# Altium PCB dental-unit-AS5600 v1_0.PcbDoc
Units mm, origin at the board's own origin, x right, y up, seen from the top; angles counter-clockwise.
Board outline 34 x 38.63 mm, 2 copper layers (Top Layer, Bottom Layer), stack 0.571 mm thick; 8 components, 7 nets, 34 pads, 57 vias.
Unrouted connection lines stored in the file: 1.
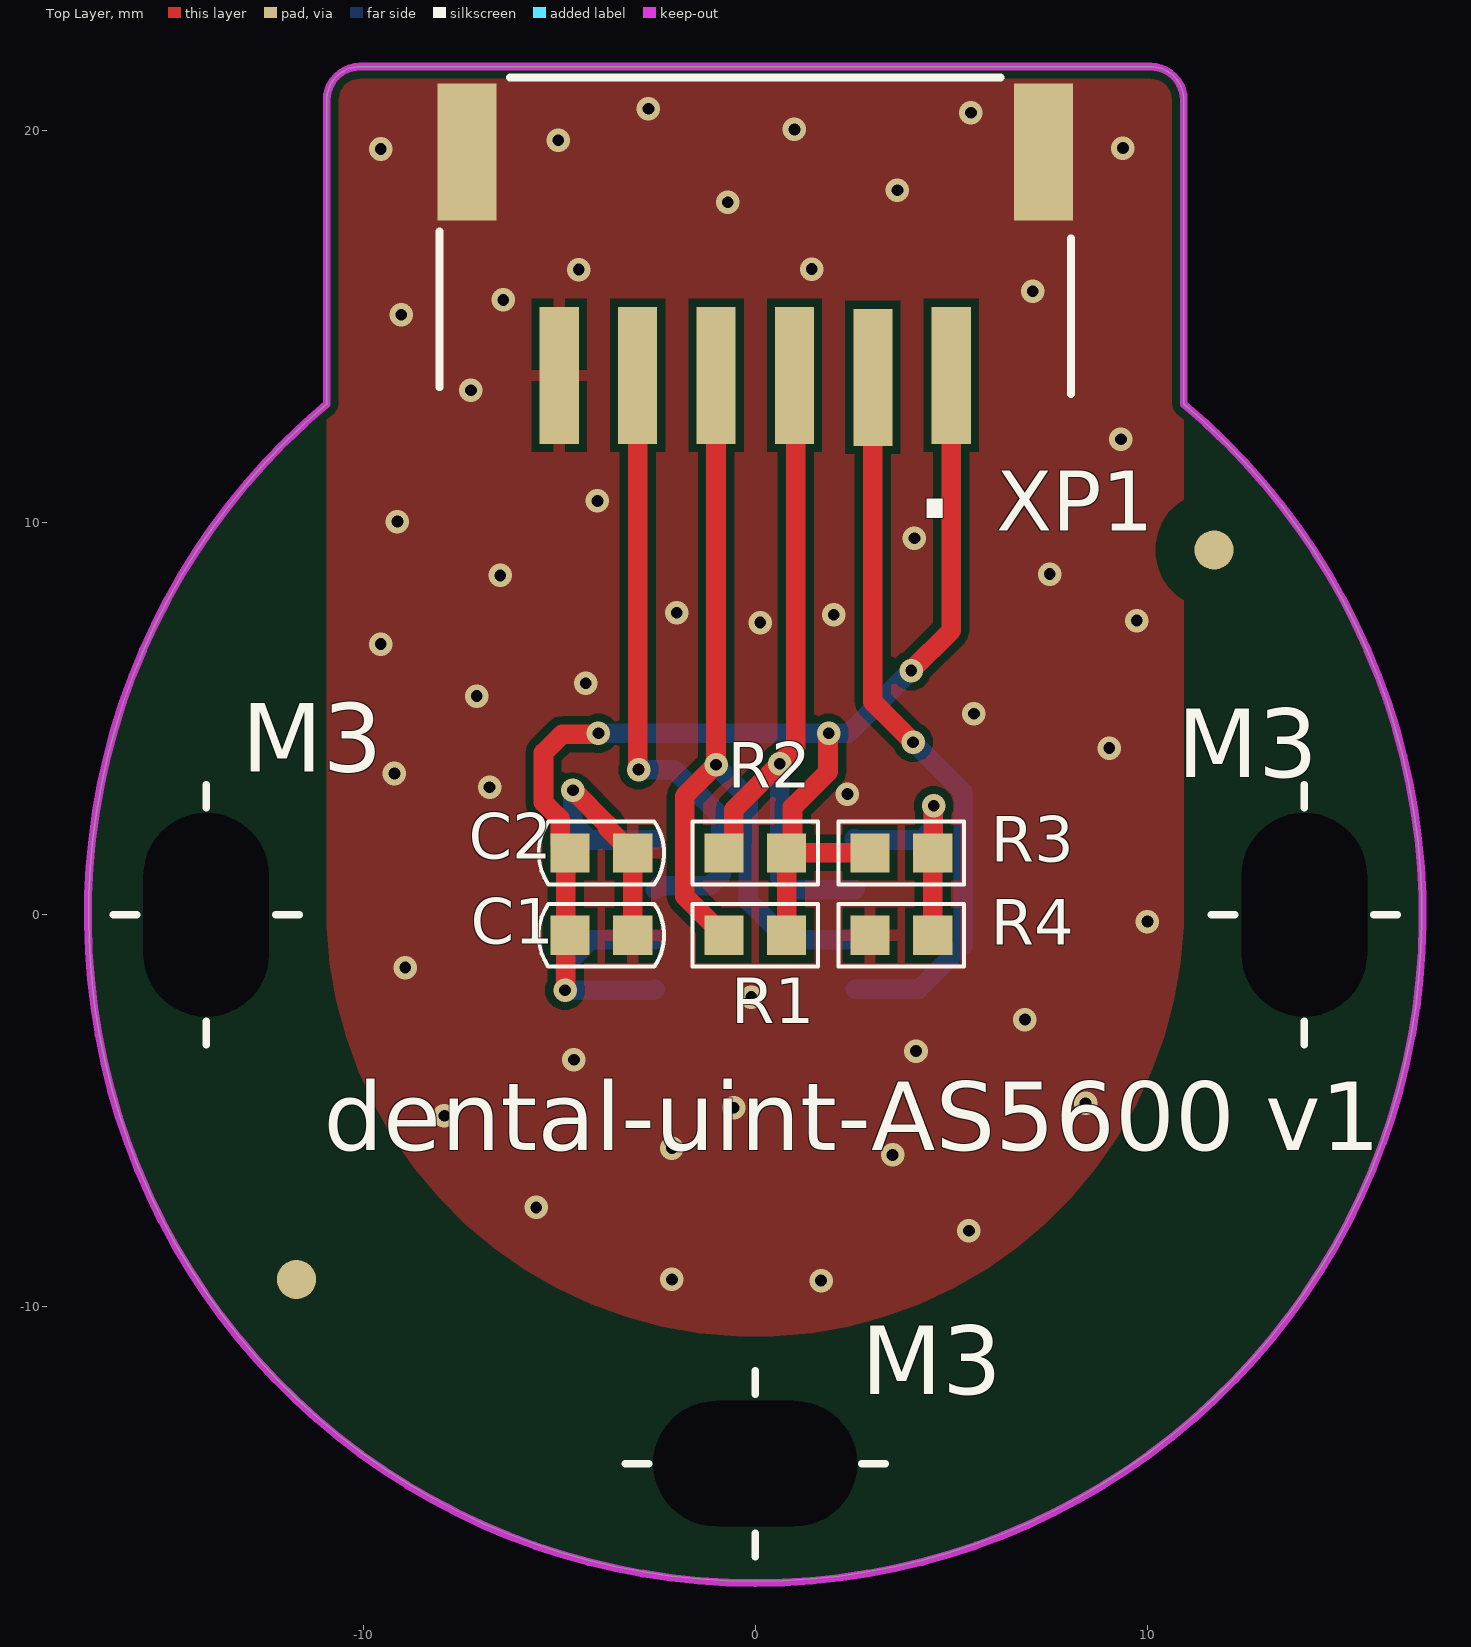
[diagram p0: Top Layer view]
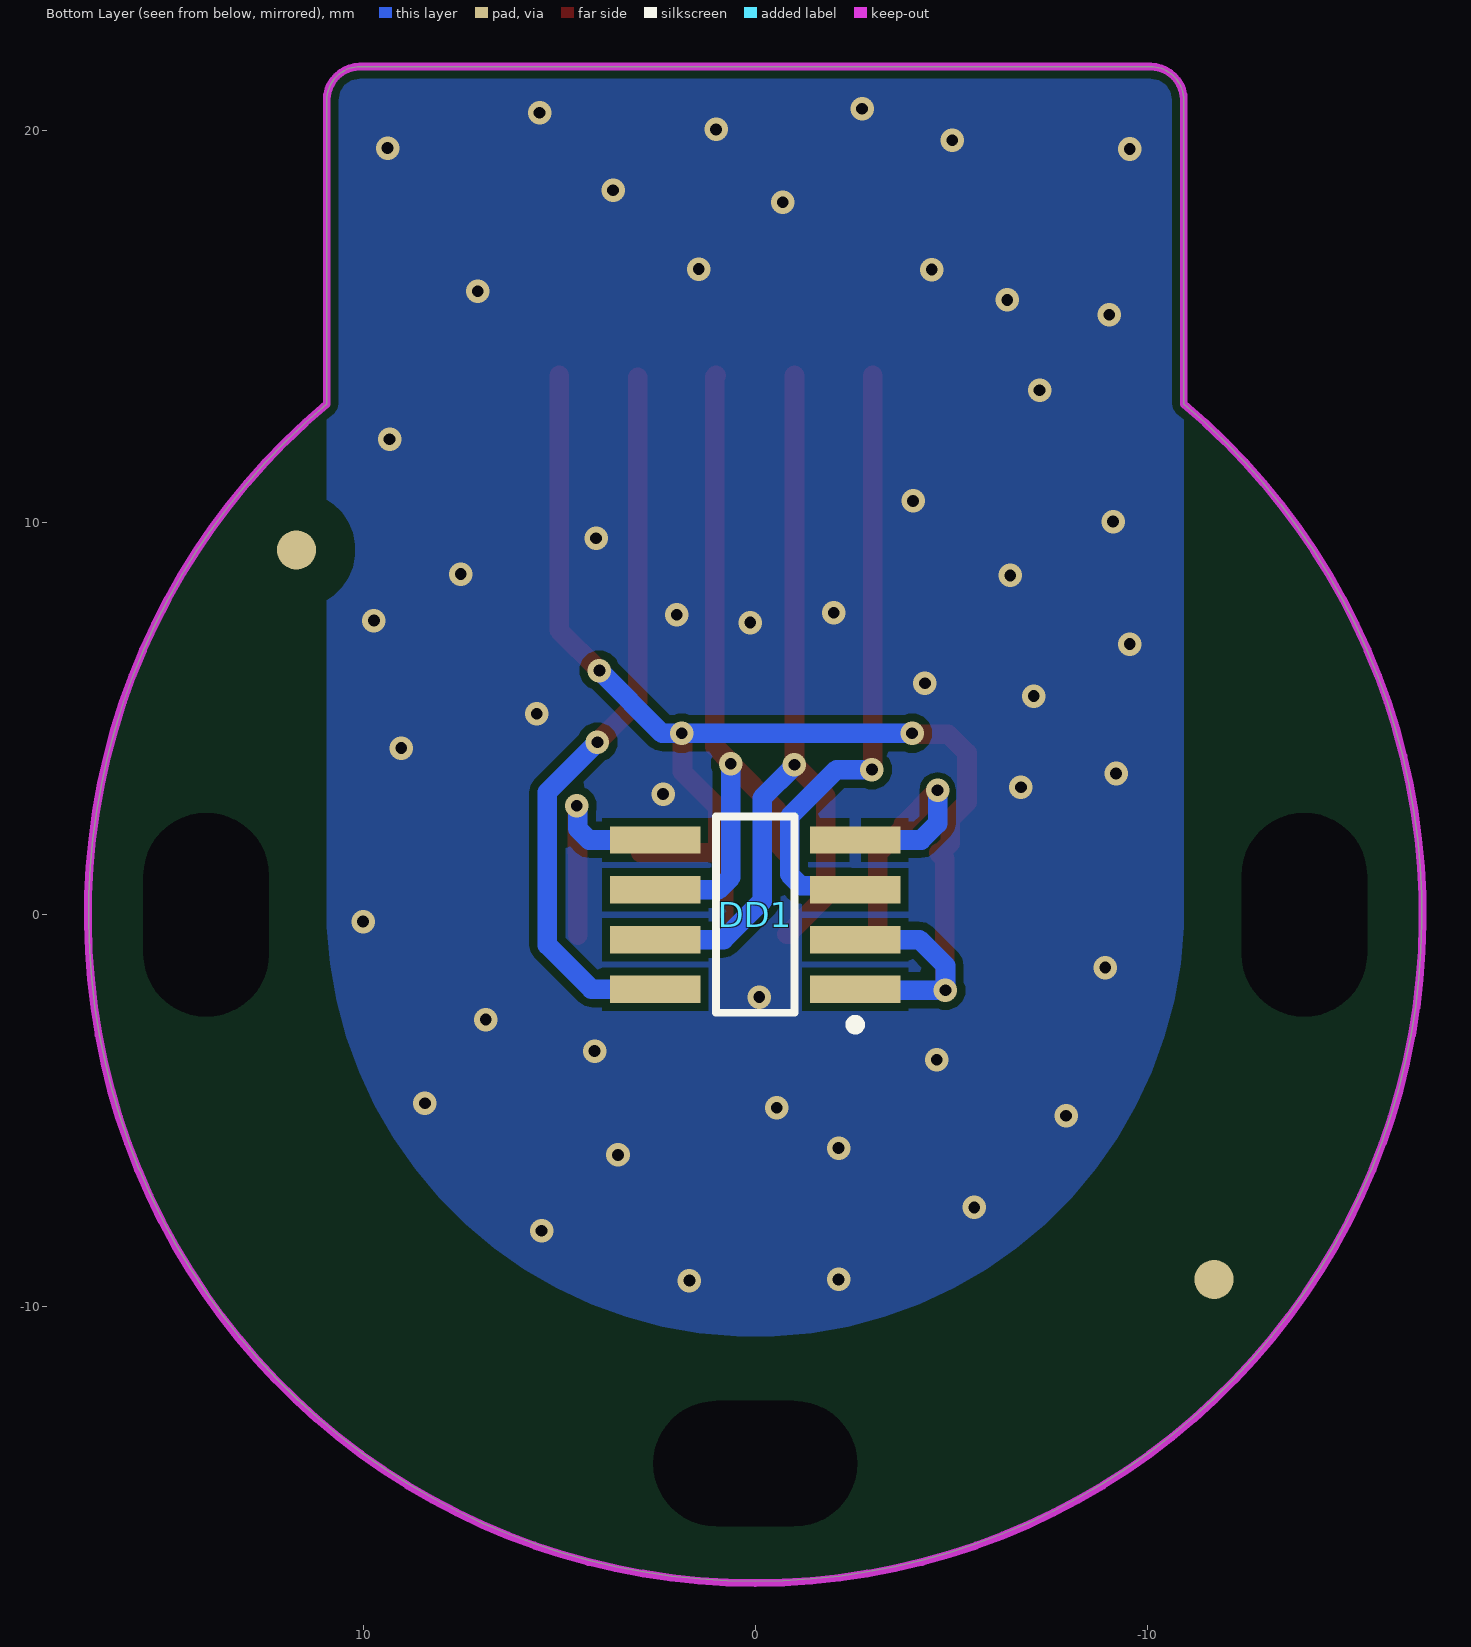
[diagram p1: Bottom Layer view, seen from below]
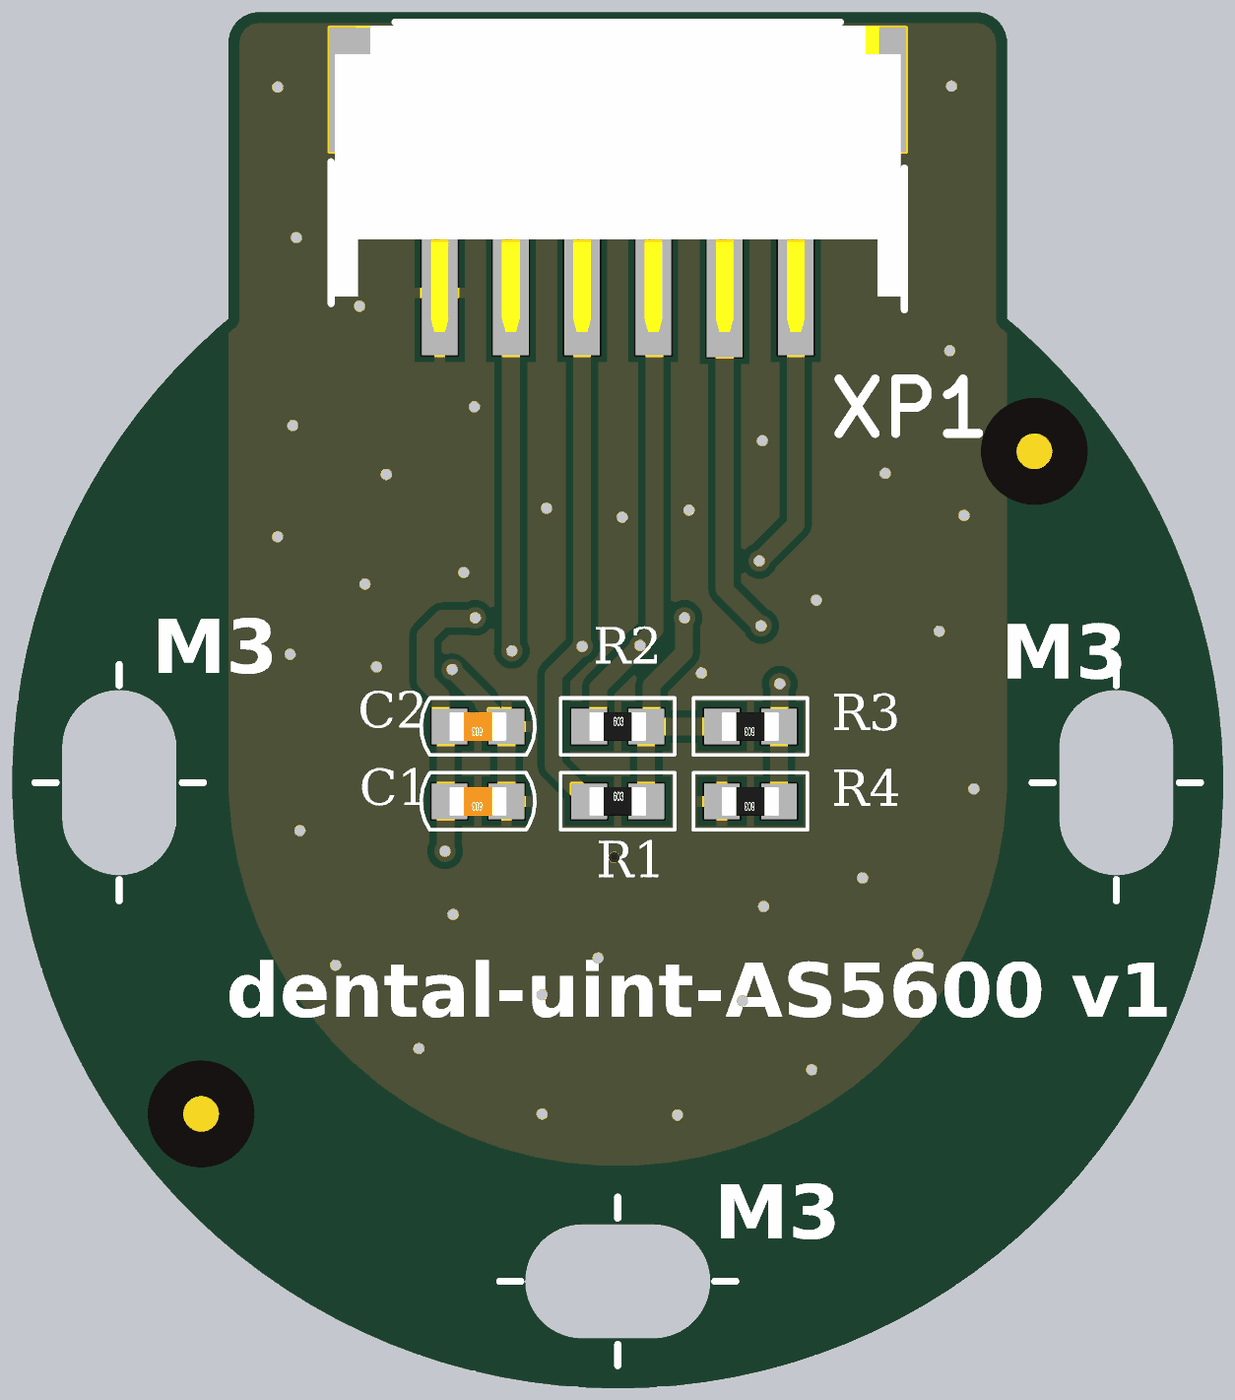
[diagram p2: 3D render of the assembled board from above, using the file's embedded part models]

## Layer stack, top to bottom
Top Solder: solder mask 0.0102, Solder Resist, Dk 3.5
Top Layer: signal copper 0.0356
Dielectric1: core 0.5, FR-4, Dk 4.8
Bottom Layer: signal copper 0.0356
Bottom Solder: solder mask 0.0102, Solder Resist, Dk 3.5

## Board outline
-10.927,13.023 ccw(c0,0) 10.927,13.023 10.927,20.773 ccw(c10.075,20.773) 10.075,21.625 -10.075,21.625 ccw(c-10.075,20.773) -10.927,20.773

## Design rules (kind name [scope] priority, off if disabled: settings)
Clearance "Stitching No Net" [IsStitchingVia and InNet('No Net') vs (IsVia and (Not IsStitchingVia)) Or IsPad] p1: gap=0.127 ignorepadtopadclearanceinfootprint=FALSE except(0: Arc-Hole Track-Hole SMDPad-Hole THPad-Hole Via-Hole Fill-Hole Poly-Hole Region-Hole Text-Hole)
Clearance Clearance_2 [(InPadClass('New Class 2')) vs (InPadClass('New Class 3'))] p2: gap=0.15 ignorepadtopadclearanceinfootprint=FALSE except(0: Arc-Hole Track-Hole SMDPad-Hole THPad-Hole Via-Hole Fill-Hole Poly-Hole Region-Hole Text-Hole)
Clearance Clearance_1 [InPadClass('Reper')] p3: gap=1 ignorepadtopadclearanceinfootprint=FALSE except(0: Arc-Hole Track-Hole SMDPad-Hole THPad-Hole Via-Hole Fill-Hole Poly-Hole Region-Hole Text-Hole)
Clearance [All] p4: gap=0.2 ignorepadtopadclearanceinfootprint=FALSE except(0: Arc-Hole Track-Hole SMDPad-Hole THPad-Hole Via-Hole Fill-Hole Poly-Hole Region-Hole Text-Hole)
HoleSize [(InPadClass('Mounting Holes'))] p1: absolutevalues=TRUE maxlimit=6 minlimit=0.025 maxpercent=80.000 minpercent=20.000
HoleToHoleClearance [All] p1: gap=0.1 allowstackedmicrovias=TRUE
Length [InNetClass('SD_net_class')] p1: maxlimit=27 minlimit=26
MatchedLengths [InNetClass('SD_net_class')] p1: tolerance=1 checknetsindiffpair=FALSE checkdiffpairvsdiffpair=TRUE checkxsignals=TRUE checkothers=TRUE
MinimumSolderMaskSliver [All] p1 off: minsoldermaskwidth=0.1
PlaneClearance [All] p1: clearance=0.2
PlaneConnect [All] p1: planeconnectstyle=Direct reliefexpansion=0.2 reliefentries=4 reliefconductorwidth=0.2 reliefairgap=0.2
PolygonConnect Polygon_24v [InNamedPolygon('24V_L01_P000')] p1: connectstyle=Direct reliefconductorwidth=0.2 reliefentries=4 polygonreliefangle="90 Angle" airgapwidth=0.3
PolygonConnect PolygonConnectCoponent [(InPadClass('New Class'))] p2: connectstyle=Relief reliefconductorwidth=0.3 reliefentries=4 polygonreliefangle="90 Angle" airgapwidth=0.2
PolygonConnect PolygonConnectALL [All] p3: connectstyle=Direct reliefconductorwidth=0.3 reliefentries=2 polygonreliefangle="45 Angle" airgapwidth=0.7
RoutingVias [All] p1: holewidth=0.711 width=1.27 viastyle="Through Hole" minholewidth=0.711 minwidth=1.27 maxholewidth=0.711 maxwidth=1.27
SilkToSilkClearance [All] p1 off: silktosilkclearance=0.254
SilkToSolderMaskClearance [IsPad] p1 off: minsilkscreentomaskgap=0.254 clearancetoexposedcopper=TRUE
SolderMaskExpansion [All] p1: expansion=0.05 istentingtop=FALSE
ViasUnderSMD [All] p1: allowed=FALSE
Width [All] p1: maxlimit=1.5 minlimit=0.2 preferedwidth=0.2
23 further rules are at their usual default settings.

## Classes and differential pairs
pad class "Mounting Holes": Free-M0
pad class "New Class": C1-1 C1-2 C2-1 C2-2 DD1-1 DD1-2 DD1-3 DD1-4 DD1-5 DD1-6 DD1-7 DD1-8 Free-M0 R1-1 R1-2 R2-1 R2-2 R3-1 R3-2 R4-1 R4-2 XP1- XP1-1 XP1-2 XP1-3 XP1-4 XP1-5 XP1-6
pad class Reper: Free-RepPoint2

## Components (designator, comment, footprint, x,y, rotation, side; value= is the part's Value field where it differs from the comment)
C1 "CL10A106KP8NNNC" CC_0603 -3.925,-0.525 r180 top value=10uF
C2 "CC0603KRX7R5BB104" CC_0603 -3.925,1.575 r180 top value=0.1uF
DD1 "AS5600" SOIC-8 0,0 r0 bottom
R1 "AC0603FR-0710KL" RC_0603 0,-0.525 r0 top value=10K
R2 "AC0603FR-0710KL" RC_0603 0,1.575 r0 top value=10K
R3 "AC0603FR-070RL" RC_0603 3.725,1.575 r180 top value=0
R4 "AC0603FR-070RL" RC_0603 3.725,-0.525 r180 top value=0
XP1 "KLS1-XL1-2.00-06-RM" KLS1-XL1-2.00-06-RM 0,13.75 r180 top

## Footprints (in the part's own frame and the unit in brackets; to place one, negate y for a bottom-side part, rotate by r counter-clockwise, add the part's x,y. Pads: shape width x height; smd on the part's side, far side on the other; paste and mask are expansions set on the pad)
CC_0603 [mm]
  rect 1x1 smd: 1(-0.8,0) 2(0.8,0)
  silkscreen extent -1.6,-0.8 1.6,0.8, body extent -0.8,-0.4 0.8,0.4, height 0.3
KLS1-XL1-2.00-06-RM [mm]
  rect 1x3.5 smd: 1(-5,0) 2(-3,0.05) 3(-1,0) 4(1,0) 5(3,0) 6(5,0)
  rect 1.5x3.5 smd: PAD(-7.35,-5.7) PAD(7.35,-5.7)
  round 0.5 on Mech1: ""(-7.325,0.525)
  silkscreen extent -8.05,-7.6 8.05,0.48, body extent -7.95,-7.5 7.95,1.1, height 5.5
RC_0603 [mm]
  rect 1x1 smd: 1(-0.8,0) 2(0.8,0)
  silkscreen extent -1.6,-0.8 1.6,0.8, body extent -0.8,-0.4 0.8,0.4, height 0.3
SOIC-8 [mm]
  rect 2.3x0.7 smd: 1(-2.55,1.905) 2(-2.55,0.635) 3(-2.55,-0.635) 4(-2.55,-1.905) 5(2.55,-1.905) 6(2.55,-0.635) 7(2.55,0.635) 8(2.55,1.905)
  silkscreen extent -2.67,-2.5 1,2.93, body extent -3.1,-2.51 3.1,2.49, height 1.75

## Part data
C1: library part C, "Cap Ceramic, 0603, 10u, 10%, 16V, X5R (Sumsung)", type=CL10A106KP8NNNC
C2: library part C, "Cap Ceramic, 0603, 0.1u, 10%, 16V, X7R (Yageo)", type=CC0603KRX7R5BB104
DD1: "12-Bit Programmable Contactless / Potentiometer", ComponentLink1Description=datasheet, ComponentLink1URL=https://ams.com/documents/20143/36005/AS5600_DS000365_5-00.pdf, type=AS5600
R1 R2: library part R, "Res, 0603, 10K, 1%, 0.25W (ф. Yageo)", power=0.25W, type=AC0603FR-0710KL
R3 R4: library part R, "Res, 0603, 0, 1%, 0.25W (ф. Yageo)", power=0.25W, type=AC0603FR-070RL
XP1: library part KLS1-XL1-2.00-06-x, "2.0mm, 6pin, KLS", ComponentLink1Description=link, ComponentLink1URL=https://klsele.com/admin/product_upload/20220615100315L-KLS1-XL1-2.00.pdf, name=nane

## Free pads (board coordinates)
  round 3 hole 3.2 slot 5.2 at 90 deg unplated: M0(-14,0) M0(14,0)
  round 3 hole 3.2 slot 5.2 at 0 deg unplated: M0(0,-14)
  round 1 all layers, no hole paste+1 mask+1: RepPoint2(-11.7,-9.3) RepPoint2(11.7,9.3)

## Via types
v1: diameter 0.6, hole 0.3, Top Layer to Bottom Layer, tented both sides, 57 vias

## Nets (pads, with @x,y where several pads share a name; then routed paths per layer and width w, separated by ;. In a path a pad name is that pad's centre, name@x,y a point inside that pad or via, vN(x,y) a via of type N, cw(c..) or ccw(c..) an arc to the next point about the centre after c; other vN are vias at no path point)
3.3V: C1.2 C2.2 DD1.1 DD1.2 R1.2 R2.2 R3.2 XP1.1 | length 37.8
  Top Layer w0.5: v1(-4.85,-1.925) -4.831,-1.906 -4.831,1.419 C2.2@-4.675,1.575 ; C2.2 -4.975,1.825 -4.975,2.439 -5.4,2.864 -5.4,4.125 -4.919,4.606 -4.019,4.606 v1(-4,4.625) ; R1.2 R2.2 ; v1(1.875,4.625) 1.856,4.606 1.856,3.642 0.95,2.736 0.95,1.725 R2.2 ; R3.2 R2.2 ; v1(3.975,6.225) 5,7.25 XP1.1
  Bottom Layer w0.5: v1(-4,4.625) v1(1.875,4.625) 2.375,4.625 v1(3.975,6.225) ; DD1.1 -2.57,-1.925 v1(-4.85,-1.925) -4.85,-1.3 -4.185,-0.635 DD1.2
DIR_AS: DD1.8 XP1.2 | length 18.6
  Top Layer w0.5: XP1.2 3,5.425 v1(4.025,4.4)
  Bottom Layer w0.5: DD1.8 2.555,-1.9 4.175,-1.9 5.3,-0.775 5.3,3.125 v1(4.025,4.4)
GND: C1.1 C2.1 DD1.4 R4.2 XP1.6 XP1.PAD | length 7.5
  Top Layer w0.5: v1(-4.65,3.175) -3.775,2.3 -3.775,2.225 C2.1 C1.1
  Bottom Layer w0.5: v1(-4.65,3.175) -4.65,2.325 -4.23,1.905 DD1.4
  other v1: 1.678,-9.331 -2.125,-9.3 5.448,-8.061 -5.584,-7.466 3.5,-6.125 -2.125,-5.95 -7.925,-5.125 -0.55,-4.925 8.424,-4.808 -4.625,-3.7 4.099,-3.479 6.875,-2.675 -0.1,-2.1 -8.925,-1.35 10,-0.175 2.35,3.075 -6.775,3.25 -9.2,3.6 9.025,4.25 5.575,5.125 -7.1,5.575 -4.325,5.9 -9.55,6.9 0.125,7.45 9.725,7.5 2,7.65 -2,7.7 -6.5,8.65 7.511,8.684 4.059,9.597 -9.125,10.025 -4.025,10.55 9.325,12.125 -7.25,13.375 -9.025,15.3 -6.425,15.675 7.075,15.9 -4.5,16.45 1.44,16.462 -0.703,18.168 3.625,18.475 -9.55,19.525 9.375,19.55 -5.025,19.75 1,20.025 5.5,20.45 -2.725,20.55
NetDD1_5: DD1.5 R3.1 R4.1 | length 6
  Top Layer w0.5: R4.1 R3.1 4.537,1.588 4.537,2.762 v1(4.55,2.775)
  Bottom Layer w0.5: DD1.5@2.525,1.93 DD1.5 4.238,1.905 4.531,2.198 4.531,2.756 v1(4.55,2.775)
OUT_AS: DD1.3 XP1.5 | length 16
  Top Layer w0.5: v1@-3,3.7 XP1.5
  Bottom Layer w0.5: v1(-2.975,3.7) -2.075,3.7 -0.875,2.5 -0.875,1.028 -1.168,0.735 -2.45,0.735 DD1.3
SCL: DD1.7 R1.1 XP1.4 | length 22
  Top Layer w0.5: XP1.4 v1(-1,3.825) -1.8,3.025 -1.8,0.475 -0.825,-0.5 R1.1@-0.8,-0.5
  Bottom Layer w0.5: v1(-1,3.825) -1,3.798 -0.175,2.973 -0.175,0.35 0.81,-0.635 DD1.7
SDA: DD1.6 R2.1 XP1.3 | length 17.9
  Top Layer w0.5: R2.1 -0.55,1.825 -0.55,2.675 v1(0.625,3.85) 0.625,3.877 1.031,4.283 1.031,13.719 XP1.3
  Bottom Layer w0.5: v1(0.625,3.85) 0.625,0.95 0.94,0.635 DD1.6
pads on no net: XP1.

## Polygon pours and split planes (outlines as drawn)
GND on Top Layer "GND_L01_P000" (solid, pour order 0): -10.927,21.625 10.927,21.625 10.925,0.175 cw(c-0.001,0.175) -10.927,0.175
GND on Bottom Layer "GND_L02_P001" (solid, pour order 1): -10.927,21.825 10.927,21.825 10.925,0.175 cw(c-0.001,0.175) -10.927,0.175

## Keep-outs
Keep-Out Layer:
  the board outline again, w0.2

## Silkscreen, mask and mechanical layers (free items; w line width, h text height)
Top Overlay:
  lines w0.2: -16.362,0 -15.775,0 ; -14,-3.313 -14,-2.725 ; -14,2.725 -14,3.312 ; -12.225,0 -11.638,0 ; -3.312,-14 -2.725,-14 ; 0,-16.362 0,-15.775 ; 0,-12.225 0,-11.638 ; 2.725,-14 3.313,-14 ; 11.638,0 12.225,0 ; 14,-3.313 14,-2.725 ; 14,2.725 14,3.312 ; 15.775,0 16.362,0
  text "M3" at -13.094,3.075 h3
  text "M3" at 10.756,2.925 h3
  text "dental-uint-AS5600 v1" at -11,-6.575 h3
  text "M3" at 2.706,-12.8 h3
Mechanical 3:
  the board outline again, w0.2